# Altium PCB cell_adapter.PcbDoc
Units mm, origin at the board's own origin, x right, y up, seen from the top; angles counter-clockwise.
Board outline 516 x 110 mm, 4 copper layers (Top Layer, Layer 1, Layer 2, Bottom Layer), stack 1.514 mm thick; 23 components, 25 nets, 89 pads, 1532 vias.
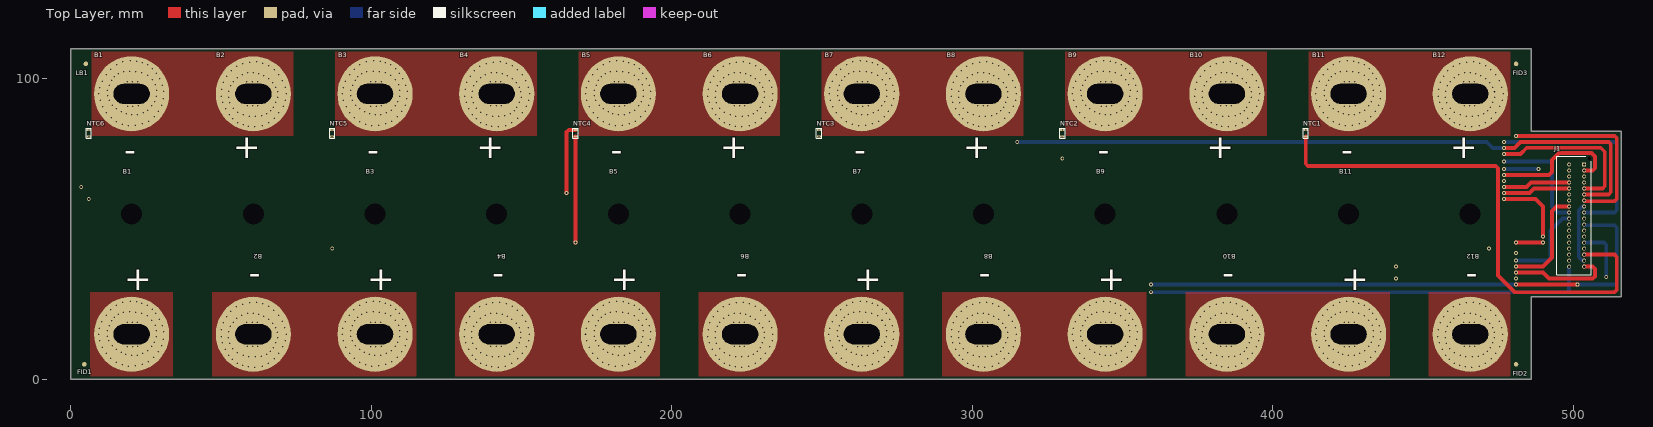
[diagram p0: Top Layer view]
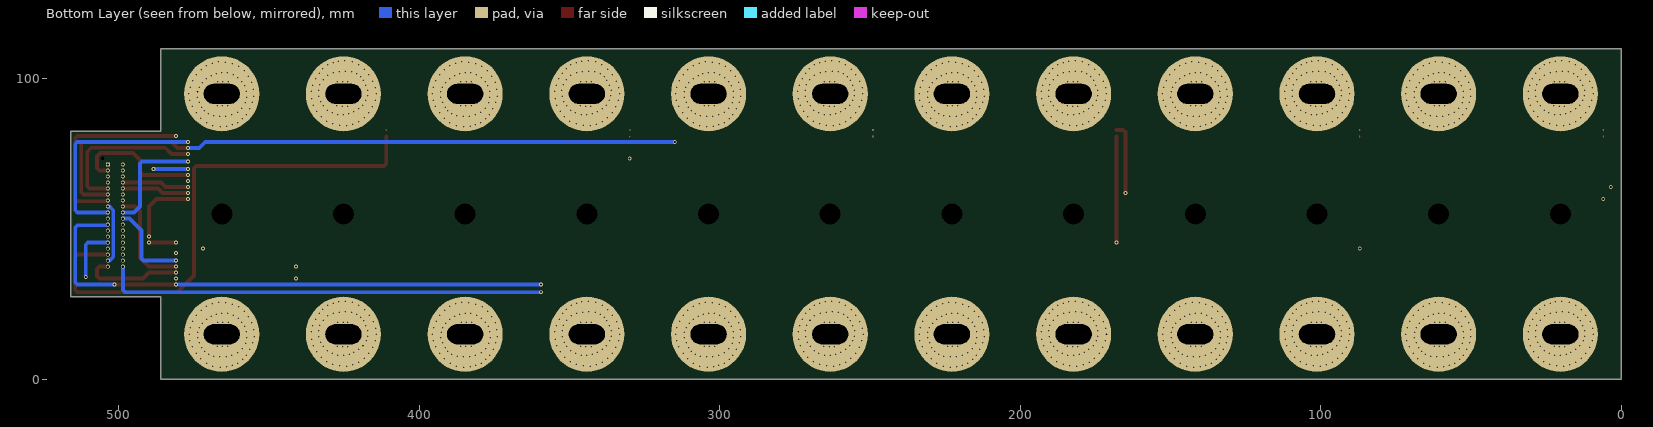
[diagram p1: Bottom Layer view, seen from below]
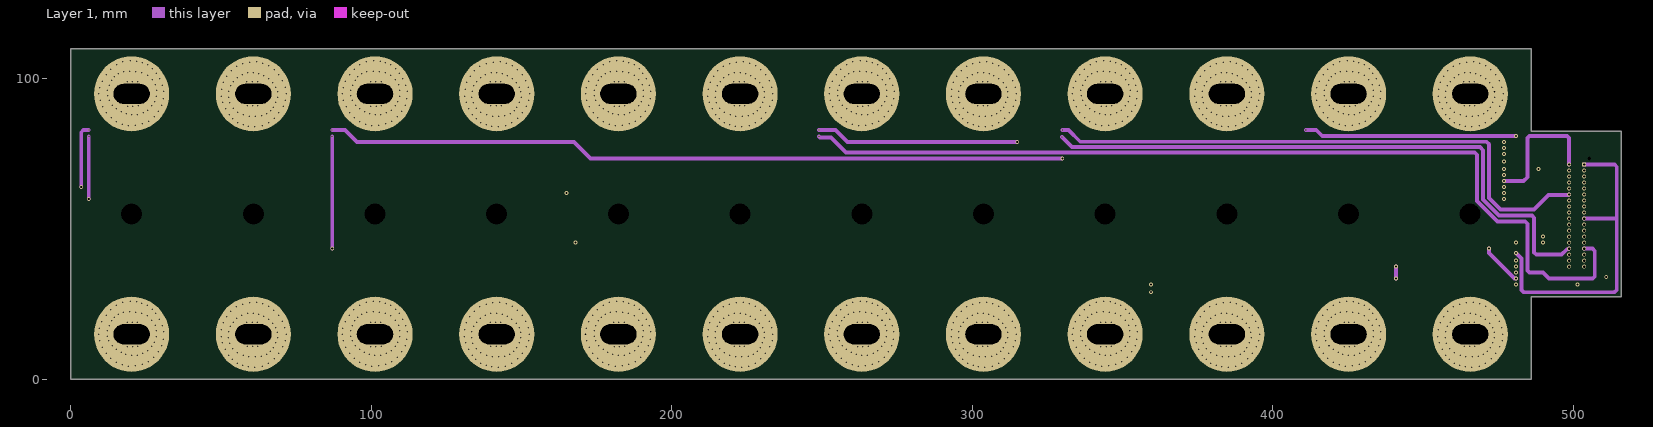
[diagram p2: Layer 1]
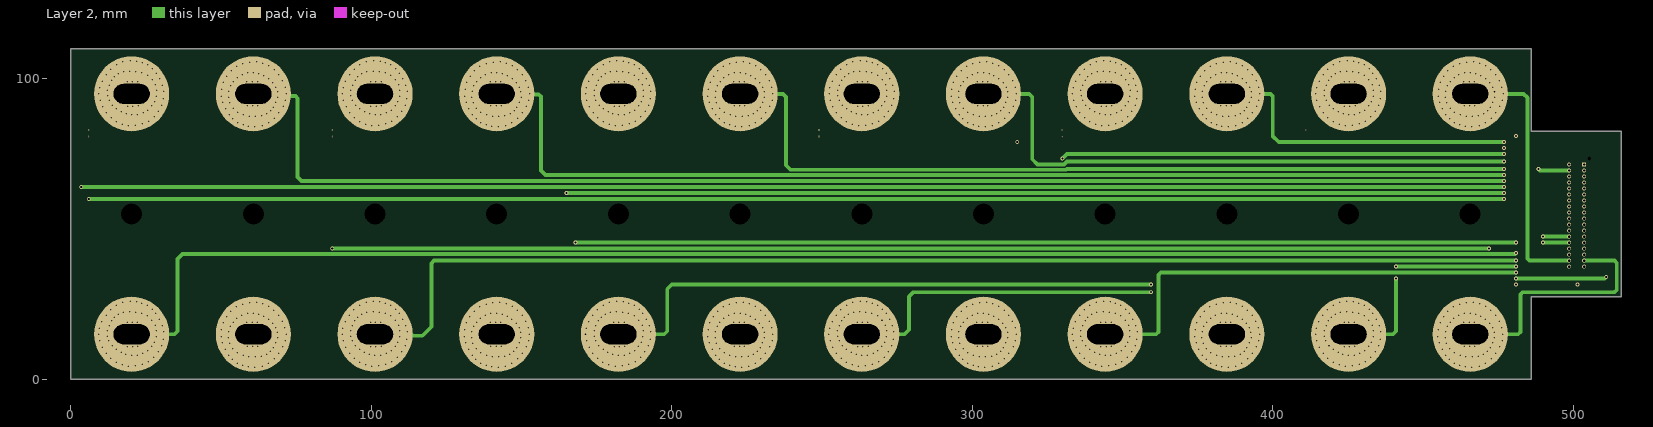
[diagram p3: Layer 2]

## Layer stack, top to bottom
Top Solder: solder mask 0.0102, Solder Resist, Dk 3.5
Top Layer: signal copper 0.0356
Dielectric 2: prepreg 0.2083, PP-006, Dk 4.1
Layer 1: signal copper 0.018
Dielectric 1: dielectric 0.9906, FR-4, Dk 4.8
Layer 2: signal copper 0.018
Dielectric 3: prepreg 0.2083, PP-006, Dk 4.1
Bottom Layer: signal copper 0.0356
Bottom Solder: solder mask 0.0102, Solder Resist, Dk 3.5

## Board outline
0.126,0.003 0.129,0 486,0 486,27.5 516,27.5 516,82.5 486,82.5 486,110 0,110 0,0

## Design rules (kind name [scope] priority, off if disabled: settings)
Clearance [All] p1: gap=0.5 ignorepadtopadclearanceinfootprint=TRUE
HoleSize [All] p1: absolutevalues=TRUE maxlimit=12 minlimit=0.025 maxpercent=80.000 minpercent=20.000
PolygonConnect [All] p1: connectstyle=Relief reliefconductorwidth=0.254 reliefentries=4 polygonreliefangle="90 Angle" airgapwidth=0.254
RoutingVias [All] p1: holewidth=0.711 width=1.27 viastyle="Through Hole" minholewidth=0.711 minwidth=1.27 maxholewidth=0.711 maxwidth=1.27
SilkToSolderMaskClearance [IsPad] p1: minsilkscreentomaskgap=0.102 clearancetoexposedcopper=TRUE
SolderMaskExpansion [All] p1: expansion=0.102 istentingtop=FALSE
Width [All] p1: maxlimit=3 minlimit=1.27 preferedwidth=1.27
28 further rules are at their usual default settings.

## Components (designator, comment, footprint, x,y, rotation, side; value= is the part's Value field where it differs from the comment)
B1 "LIBAT" LI-BATTERY 20.25,55 r0 top
B2 "LIBAT" LI-BATTERY 60.75,55 r180 top
B3 "LIBAT" LI-BATTERY 101.25,55 r0 top
B4 "LIBAT" LI-BATTERY 141.75,55 r180 top
B5 "LIBAT" LI-BATTERY 182.25,55 r0 top
B6 "LIBAT" LI-BATTERY 222.75,55 r180 top
B7 "LIBAT" LI-BATTERY 263.25,55 r0 top
B8 "LIBAT" LI-BATTERY 303.75,55 r180 top
B9 "LIBAT" LI-BATTERY 344.25,55 r0 top
B10 "LIBAT" LI-BATTERY 384.75,55 r180 top
B11 "LIBAT" LI-BATTERY 425.25,55 r0 top
B12 "LIBAT" LI-BATTERY 465.75,55 r180 top
FID1 "PE PAD" FIDUCIAL 4.5,5 r0 top
FID2 "PE PAD" FIDUCIAL 481,5 r90 top
FID3 "PE PAD" FIDUCIAL 481,105 r90 top
J1 "0559173610" "MICROFIT 36 VER" 502,55.5 r270 top
LB1 "PE PAD" FIDUCIAL 5,105 r0 top
NTC1 "10k" NTC0805-HC 411,82 r180 top
NTC2 "10k" NTC0805-HC 330,82 r180 top
NTC3 "10k" NTC0805-HC 249,82 r180 top
NTC4 "10k" NTC0805-HC 168,82 r180 top
NTC5 "10k" NTC0805-HC 87,82 r180 top
NTC6 "10k" NTC0805-HC 6,82 r180 top

## Footprints (in the part's own frame and the unit in brackets; to place one, negate y for a bottom-side part, rotate by r counter-clockwise, add the part's x,y. Pads: shape width x height; smd on the part's side, far side on the other; paste and mask are expansions set on the pad)
FIDUCIAL [mm]
  round 1.5 smd mask+0.75: 0(0,0)
LI-BATTERY [mm]
  round 0 hole 7: 0(0,0)
  round 25 hole 6.6 slot 12 at 0 deg: 1(0,-40) 2(0,40)
"MICROFIT 36 VER" [mm]
  rect 1.3x1.3 hole 0.8: 1(-16,1.65)
  round 1.3 hole 0.8: 2(-16,-3.35) 3(-14,1.65) 4(-14,-3.35) 5(-12,1.65) 6(-12,-3.35) 7(-10,1.65) 8(-10,-3.35) 9(-8,1.65) 10(-8,-3.35) 11(-6,1.65) 12(-6,-3.35) 13(-4,1.65) 14(-4,-3.35) 15(-2,1.65) 16(-2,-3.35) 17(0,1.65) 18(0,-3.35) 19(2,1.65) 20(2,-3.35) 21(4,1.65) 22(4,-3.35) 23(6,1.65) 24(6,-3.35) 25(8,1.65) 26(8,-3.35) 27(10,1.65) 28(10,-3.35) 29(12,1.65) 30(12,-3.35) 31(14,1.65) 32(14,-3.35) 33(16,1.65) 34(16,-3.35) 35(18,1.65) 36(18,-3.35)
  round 0.65 hole 1.3 unplated: MH1(-18,3.35)
  silkscreen extent -18.7,-7.45 20.7,4.05, body extent -18.73,-7.44 20.67,4.06, height 9.75
NTC0805-HC [mm]
  rect 1.45x0.75 smd: 1(0,-0.973) 2(0,1.227)
  silkscreen extent -0.89,-1.52 0.89,1.78, body extent -0.63,-0.87 0.63,1.13, height 0.95

## Part data
B1 B2 B3 B4 B5 B6 B7 B8 B9 B10 B11 B12: library part LI-BATTERY
FID1 FID2 FID3 LB1: "FIDUCIAL"
J1: library part "Header 18X2", "CONN HEADER VERT 36POS 2MM", Manufacturer_Name=Molex, Datasheet Link=https://www.molex.com/en-us/products/part-detail-pdf/559173610?display=pdf, Height=9.95mm, Manufacturer_Part_Number=0559173610
NTC1 NTC2 NTC3 NTC4 NTC5 NTC6: library part NTCS0805E3103FLT, "THERMISTOR NTC 10KOHM 3430K 0805", Manufacturer_Name=Vishay, Mouser Part Number=594-NTCS0805E3103FLT, Arrow Part Number=NTCS0805E3103FLT, Arrow Price/Stock=https://www.arrow.com/en/products/ntcs0805e3103flt/vishay, Datasheet Link=http://www.vishay.com/docs/29044/ntcs0805e3t.pdf, Height=0.95mm, Manufacturer_Part_Number=NTCS0805E3103FLT, Mouser Price/Stock=https://www.mouser.co.uk/ProductDetail/Vishay-BC-Components/NTCS0805E3103FLT?qs=%2FWiulJ9oly4Pd4lidS66Yw%3D%3D

## Via types
v1: diameter 1, hole 0.5, Top Layer to Bottom Layer, tented both sides, 1488 vias
v2: diameter 1.27, hole 0.711, Top Layer to Bottom Layer, tented both sides, 35 vias
v3: diameter 0.6, hole 0.3, Top Layer to Bottom Layer, tented both sides, 9 vias

## Nets (pads, with @x,y where several pads share a name; then routed paths per layer and width w, separated by ;. In a path a pad name is that pad's centre, name@x,y a point inside that pad or via, vN(x,y) a via of type N, cw(c..) or ccw(c..) an arc to the next point about the centre after c; other vN are vias at no path point)
B1+: B11.2 B12.1 J1.34 | length 87.2
  Layer 2 w1.27: B12.1 476.697,95 483.5,95 484.77,93.73 484.77,40.244 485.514,39.5 J1.34
  other v1: 466.283,84.032 464.124,84.159 468.722,84.362 424.183,84.413 426.52,84.489 462.321,84.642 422.151,84.921 428.806,84.997 460.492,85.429 470.83,85.429 420.145,85.759 430.889,85.836 458.867,86.725 472.76,86.801 418.392,87.055 432.718,87.385 466.41,87.512 464.353,87.614 468.493,87.664 427.18,88.02 462.423,88.02 425.275,88.045 457.673,88.096 470.195,88.376 423.421,88.401 474.259,88.63 416.817,88.706 429.06,88.757 460.492,88.858 421.796,89.036 434.14,89.138 471.516,89.366 430.686,89.62 456.504,90.001 420.195,90.027 459.019,90.281 472.43,90.585 415.598,90.636 475.631,90.839 423.904,90.941 425.606,90.941 427.409,90.966 431.956,91.017 463.801,91.035 465.623,91.043 467.249,91.068 435.308,91.144 418.798,91.271 457.876,92.033 455.539,92.135 473.243,92.236 432.87,92.414 414.734,92.795 417.757,92.795 476.443,92.948 435.842,93.43 457.495,93.862 473.853,93.887 433.48,94.218 455.057,94.218 417.224,94.37 476.697,94.98 414.353,95.056 473.827,95.665 435.994,95.818 457.571,95.818 417.198,96.148 433.556,96.173 455.209,96.605 414.607,97.088 473.294,97.24 476.316,97.24 458.181,97.621 417.808,97.799 435.512,97.901 433.175,98.002 472.252,98.764 455.742,98.891 423.802,98.967 425.428,98.993 427.25,99 459.095,99.018 463.642,99.069 465.445,99.094 467.147,99.094 415.42,99.196 475.453,99.399 418.621,99.45 432.032,99.755 470.855,100.009 434.546,100.034 460.365,100.415 419.535,100.669 456.911,100.898 469.255,100.999 430.559,101.177 461.991,101.279 474.234,101.33 416.792,101.406 467.63,101.634 420.856,101.66 433.378,101.939 465.775,101.99 428.628,102.015 463.87,102.015 422.558,102.371 426.698,102.422 424.64,102.523 458.333,102.65 472.659,102.981 418.29,103.235 432.184,103.311 460.162,104.2 470.906,104.276 420.221,104.606 430.559,104.606 462.245,105.038 468.9,105.114 428.73,105.394 464.531,105.546 466.868,105.622 422.329,105.673 426.926,105.876 424.767,106.003
B1-: B12.2 J1.15 J1.33 | length 102.4
  Layer 2 w1.27: B12.2 481.756,15 482.5,15.744 482.5,28.256 483.244,29 513.756,29 514.5,29.744 514.5,38.75 513.756,39.494 503.656,39.494 J1.33
  Bottom Layer w1.27: J1.33 503.644,39.506 503.12,39.506 501.865,40.761 501.865,56.239 503.12,57.494 503.644,57.494 J1.15
  other v1: 466.233,3.997 464.074,4.124 468.671,4.327 462.27,4.606 460.441,5.394 470.779,5.394 458.816,6.689 472.71,6.765 466.36,7.477 464.302,7.578 468.442,7.629 462.372,7.985 457.622,8.061 470.144,8.34 474.208,8.594 460.441,8.823 471.465,9.331 456.454,9.966 458.968,10.245 472.379,10.55 475.58,10.804 463.75,11 465.572,11.007 467.198,11.033 457.825,11.998 455.488,12.099 473.192,12.201 476.393,12.912 457.444,13.827 473.802,13.852 455.006,14.182 476.647,14.944 473.776,15.63 457.52,15.782 455.158,16.57 473.243,17.205 476.266,17.205 458.13,17.586 472.202,18.729 455.692,18.856 459.044,18.983 463.591,19.034 465.394,19.059 467.096,19.059 475.402,19.364 470.805,19.973 460.314,20.38 456.86,20.862 469.204,20.964 461.94,21.243 474.183,21.294 467.579,21.599 465.725,21.955 463.82,21.98 458.282,22.615 472.608,22.945 460.111,24.164 470.855,24.241 462.194,25.003 468.849,25.079 464.48,25.511 466.817,25.587
B2+: B10.2 B11.1 J1.16 | length 112.7
  Top Layer w1.27: v2(481,37.5) 490,37.5 493,40.5 493,56 494.494,57.494 498.644,57.494 J1.16
  Layer 1 w1.27: v2(441,33.5) v2(441,37.5)
  Layer 2 w1.27: B11.1 440,15 441,16 v2(441,33.5) ; v2(441,37.5) v2(481,37.5)
  other v1: 385.233,3.997 383.074,4.124 387.671,4.327 424.132,4.378 426.469,4.454 381.27,4.606 422.1,4.886 428.755,4.962 379.441,5.394 389.779,5.394 420.094,5.724 430.838,5.8 377.816,6.689 391.71,6.765 418.341,7.019 432.667,7.35 385.36,7.477 383.302,7.578 387.442,7.629 381.372,7.985 427.13,7.985 425.225,8.01 376.622,8.061 389.144,8.34 423.37,8.366 393.208,8.594 416.766,8.67 429.009,8.721 379.441,8.823 421.745,9.001 434.089,9.102 390.465,9.331 430.635,9.585 375.454,9.966 420.145,9.991 377.968,10.245 391.379,10.55 415.547,10.601 394.58,10.804 423.853,10.906 425.555,10.906 427.358,10.931 431.905,10.982 382.75,11 384.572,11.007 386.198,11.033 435.258,11.109 418.748,11.236 376.825,11.998 374.488,12.099 392.192,12.201 432.819,12.379 414.684,12.76 417.706,12.76 395.393,12.912 435.791,13.395 376.444,13.827 392.802,13.852 374.006,14.182 433.429,14.182 417.173,14.335 395.647,14.944 414.303,15.02 392.776,15.63 376.52,15.782 435.943,15.782 417.147,16.113 433.505,16.138 374.158,16.57 414.557,17.052 392.243,17.205 395.266,17.205 377.13,17.586 417.757,17.764 435.461,17.865 433.124,17.967 391.202,18.729 374.692,18.856 423.751,18.932 425.377,18.957 378.044,18.983 427.199,18.965 382.591,19.034 384.394,19.059 386.096,19.059 415.369,19.161 394.402,19.364 418.57,19.415 431.981,19.719 389.805,19.973 434.496,19.999 379.314,20.38 419.484,20.634 375.86,20.862 388.204,20.964 430.508,21.142 380.94,21.243 393.183,21.294 416.741,21.37 386.579,21.599 420.805,21.624 433.327,21.904 384.725,21.955 382.82,21.98 428.577,21.98 422.507,22.336 426.647,22.386 424.59,22.488 377.282,22.615 391.608,22.945 418.24,23.199 432.133,23.275 379.111,24.164 389.855,24.241 420.17,24.571 430.508,24.571 381.194,25.003 387.849,25.079 428.679,25.358 383.48,25.511 385.817,25.587 422.278,25.638 426.876,25.841 424.717,25.968
B3+: B9.2 B10.1 J1.17 | length 177.6
  Layer 2 w1.27: B10.1 395.697,95 399.256,95 400,94.256 400,81 402,79 v2(477,79)
  Bottom Layer w1.27: v2(477,79) 513.756,79 514.5,78.256 514.5,56.25 513.756,55.506 503.656,55.506 J1.17
  other v1: 385.283,84.032 383.124,84.159 387.722,84.362 343.183,84.413 345.52,84.489 381.321,84.642 341.151,84.921 347.806,84.997 379.492,85.429 389.83,85.429 339.145,85.759 349.889,85.836 377.867,86.725 391.76,86.801 337.392,87.055 351.718,87.385 385.41,87.512 383.353,87.614 387.493,87.664 346.18,88.02 381.423,88.02 344.275,88.045 376.673,88.096 389.195,88.376 342.421,88.401 393.259,88.63 335.817,88.706 348.06,88.757 379.492,88.858 340.796,89.036 353.14,89.138 390.516,89.366 349.686,89.62 375.504,90.001 339.195,90.027 378.019,90.281 391.43,90.585 334.598,90.636 394.631,90.839 342.904,90.941 344.606,90.941 346.409,90.966 350.956,91.017 382.801,91.035 384.623,91.043 386.249,91.068 354.308,91.144 337.798,91.271 376.876,92.033 374.539,92.135 392.243,92.236 351.87,92.414 333.734,92.795 336.757,92.795 395.443,92.948 354.842,93.43 376.495,93.862 392.853,93.887 352.48,94.218 374.057,94.218 336.224,94.37 395.697,94.98 333.353,95.056 392.827,95.665 354.994,95.818 376.571,95.818 336.198,96.148 352.556,96.173 374.209,96.605 333.607,97.088 392.294,97.24 395.316,97.24 377.181,97.621 336.808,97.799 354.512,97.901 352.175,98.002 391.252,98.764 374.742,98.891 342.802,98.967 344.428,98.993 346.25,99 378.095,99.018 382.642,99.069 384.445,99.094 386.147,99.094 334.42,99.196 394.453,99.399 337.621,99.45 351.032,99.755 389.855,100.009 353.546,100.034 379.365,100.415 338.535,100.669 375.911,100.898 388.255,100.999 349.559,101.177 380.991,101.279 393.234,101.33 335.792,101.406 386.63,101.634 339.856,101.66 352.378,101.939 384.775,101.99 347.628,102.015 382.87,102.015 341.558,102.371 345.698,102.422 343.64,102.523 377.333,102.65 391.659,102.981 337.29,103.235 351.184,103.311 379.162,104.2 389.906,104.276 339.221,104.606 349.559,104.606 381.245,105.038 387.9,105.114 347.73,105.394 383.531,105.546 385.868,105.622 341.329,105.673 345.926,105.876 343.767,106.003
B4+: B8.2 B9.1 J1.35 | length 190.1
  Top Layer w1.27: v2(481,35.5) 490,35.5 492.002,33.498 506.486,33.498 507.23,34.242 507.23,36.756 506.486,37.5 J1.35
  Layer 2 w1.27: B9.1 361.256,15 362,15.744 362,34.756 362.744,35.5 v2(481,35.5)
  other v1: 304.233,3.997 302.074,4.124 306.671,4.327 343.132,4.378 345.469,4.454 300.27,4.606 341.1,4.886 347.755,4.962 298.441,5.394 308.779,5.394 339.094,5.724 349.838,5.8 296.816,6.689 310.71,6.765 337.341,7.019 351.667,7.35 304.36,7.477 302.302,7.578 306.442,7.629 300.372,7.985 346.13,7.985 344.225,8.01 295.622,8.061 308.144,8.34 342.37,8.366 312.208,8.594 335.766,8.67 348.009,8.721 298.441,8.823 340.745,9.001 353.089,9.102 309.465,9.331 349.635,9.585 294.454,9.966 339.145,9.991 296.968,10.245 310.379,10.55 334.547,10.601 313.58,10.804 342.853,10.906 344.555,10.906 346.358,10.931 350.905,10.982 301.75,11 303.572,11.007 305.198,11.033 354.258,11.109 337.748,11.236 295.825,11.998 293.488,12.099 311.192,12.201 351.819,12.379 333.684,12.76 336.706,12.76 314.393,12.912 354.791,13.395 295.444,13.827 311.802,13.852 293.006,14.182 352.429,14.182 336.173,14.335 314.647,14.944 333.303,15.02 311.776,15.63 295.52,15.782 354.943,15.782 336.147,16.113 352.505,16.138 293.158,16.57 333.557,17.052 311.243,17.205 314.266,17.205 296.13,17.586 336.757,17.764 354.461,17.865 352.124,17.967 310.202,18.729 293.692,18.856 342.751,18.932 344.377,18.957 297.044,18.983 346.199,18.965 301.591,19.034 303.394,19.059 305.096,19.059 334.369,19.161 313.402,19.364 337.57,19.415 350.981,19.719 308.805,19.973 353.496,19.999 298.314,20.38 338.484,20.634 294.86,20.862 307.204,20.964 349.508,21.142 299.94,21.243 312.183,21.294 335.741,21.37 305.579,21.599 339.805,21.624 352.327,21.904 303.725,21.955 301.82,21.98 347.577,21.98 341.507,22.336 345.647,22.386 343.59,22.488 296.282,22.615 310.608,22.945 337.24,23.199 351.133,23.275 298.111,24.164 308.855,24.241 339.17,24.571 349.508,24.571 300.194,25.003 306.849,25.079 347.679,25.358 302.48,25.511 304.817,25.587 341.278,25.638 345.876,25.841 343.717,25.968
B5+: B7.2 B8.1 J1.18 | length 232.6
  Layer 2 w1.27: B8.1 314.697,95 319,95 320,94 320,73.244 321.744,71.5 330.503,71.5 331.503,72.5 v2(477,72.5)
  Bottom Layer w1.27: v2(477,72.5) 492.256,72.5 493,71.756 493,57.5 494.994,55.506 498.644,55.506 J1.18
  other v1: 304.283,84.032 302.124,84.159 306.722,84.362 262.183,84.413 264.52,84.489 300.321,84.642 260.151,84.921 266.806,84.997 298.492,85.429 308.83,85.429 258.145,85.759 268.889,85.836 296.867,86.725 310.76,86.801 256.392,87.055 270.718,87.385 304.41,87.512 302.353,87.614 306.493,87.664 265.18,88.02 300.423,88.02 263.275,88.045 295.673,88.096 308.195,88.376 261.421,88.401 312.259,88.63 254.817,88.706 267.06,88.757 298.492,88.858 259.796,89.036 272.14,89.138 309.516,89.366 268.686,89.62 294.504,90.001 258.195,90.027 297.019,90.281 310.43,90.585 253.598,90.636 313.631,90.839 261.904,90.941 263.606,90.941 265.409,90.966 269.956,91.017 301.801,91.035 303.623,91.043 305.249,91.068 273.308,91.144 256.798,91.271 295.876,92.033 293.539,92.135 311.243,92.236 270.87,92.414 252.734,92.795 255.757,92.795 314.443,92.948 273.842,93.43 295.495,93.862 311.853,93.887 271.48,94.218 293.057,94.218 255.224,94.37 314.697,94.98 252.353,95.056 311.827,95.665 273.994,95.818 295.571,95.818 255.198,96.148 271.556,96.173 293.209,96.605 252.607,97.088 311.294,97.24 314.316,97.24 296.181,97.621 255.808,97.799 273.512,97.901 271.175,98.002 310.252,98.764 293.742,98.891 261.802,98.967 263.428,98.993 265.25,99 297.095,99.018 301.642,99.069 303.445,99.094 305.147,99.094 253.42,99.196 313.453,99.399 256.621,99.45 270.032,99.755 308.855,100.009 272.546,100.034 298.365,100.415 257.535,100.669 294.911,100.898 307.255,100.999 268.559,101.177 299.991,101.279 312.234,101.33 254.792,101.406 305.63,101.634 258.856,101.66 271.378,101.939 303.775,101.99 266.628,102.015 301.87,102.015 260.558,102.371 264.698,102.422 262.64,102.523 296.333,102.65 310.659,102.981 256.29,103.235 270.184,103.311 298.162,104.2 308.906,104.276 258.221,104.606 268.559,104.606 300.245,105.038 306.9,105.114 266.73,105.394 302.531,105.546 304.868,105.622 260.329,105.673 264.926,105.876 262.767,106.003
B6+: B6.2 B7.1 J1.36 | length 255.7
  Layer 2 w1.27: B7.1 277.5,15 279,16.5 279,27.5 280.5,29 v2(359.5,29)
  Bottom Layer w1.27: v2(359.5,29) 497.906,29 498.65,29.744 J1.36
  other v1: 223.233,3.997 221.074,4.124 225.671,4.327 262.132,4.378 264.469,4.454 219.27,4.606 260.1,4.886 266.755,4.962 217.441,5.394 227.779,5.394 258.094,5.724 268.838,5.8 215.816,6.689 229.71,6.765 256.341,7.019 270.667,7.35 223.36,7.477 221.302,7.578 225.442,7.629 219.372,7.985 265.13,7.985 263.225,8.01 214.622,8.061 227.144,8.34 261.37,8.366 231.208,8.594 254.766,8.67 267.009,8.721 217.441,8.823 259.745,9.001 272.089,9.102 228.465,9.331 268.635,9.585 213.454,9.966 258.145,9.991 215.968,10.245 229.379,10.55 253.547,10.601 232.58,10.804 261.853,10.906 263.555,10.906 265.358,10.931 269.905,10.982 220.75,11 222.572,11.007 224.198,11.033 273.258,11.109 256.748,11.236 214.825,11.998 212.488,12.099 230.192,12.201 270.819,12.379 252.684,12.76 255.706,12.76 233.393,12.912 273.791,13.395 214.444,13.827 230.802,13.852 212.006,14.182 271.429,14.182 255.173,14.335 233.647,14.944 252.303,15.02 230.776,15.63 214.52,15.782 273.943,15.782 255.147,16.113 271.505,16.138 212.158,16.57 252.557,17.052 230.243,17.205 233.266,17.205 215.13,17.586 255.757,17.764 273.461,17.865 271.124,17.967 229.202,18.729 212.692,18.856 261.751,18.932 263.377,18.957 216.044,18.983 265.199,18.965 220.591,19.034 222.394,19.059 224.096,19.059 253.369,19.161 232.402,19.364 256.57,19.415 269.981,19.719 227.805,19.973 272.496,19.999 217.314,20.38 257.484,20.634 213.86,20.862 226.204,20.964 268.508,21.142 218.94,21.243 231.183,21.294 254.741,21.37 224.579,21.599 258.805,21.624 271.327,21.904 222.725,21.955 220.82,21.98 266.577,21.98 260.507,22.336 264.647,22.386 262.59,22.488 215.282,22.615 229.608,22.945 256.24,23.199 270.133,23.275 217.111,24.164 227.855,24.241 258.17,24.571 268.508,24.571 219.194,25.003 225.849,25.079 266.679,25.358 221.48,25.511 223.817,25.587 260.278,25.638 264.876,25.841 262.717,25.968
B7+: B5.2 B6.1 J1.4 | length 300
  Layer 2 w1.27: B6.1 233.697,95 237,95 238,94 238,71.244 239.514,69.73 331.236,69.73 331.506,70 v2(477,70) ; v2(488.5,70) 489,69.5 J1.4
  Bottom Layer w1.27: v2(477,70) v2(488.5,70)
  other v1: 223.283,84.032 221.124,84.159 225.722,84.362 181.183,84.413 183.52,84.489 219.321,84.642 179.151,84.921 185.806,84.997 217.492,85.429 227.83,85.429 177.145,85.759 187.889,85.836 215.867,86.725 229.76,86.801 175.392,87.055 189.718,87.385 223.41,87.512 221.353,87.614 225.493,87.664 184.18,88.02 219.423,88.02 182.275,88.045 214.673,88.096 227.195,88.376 180.421,88.401 231.259,88.63 173.817,88.706 186.06,88.757 217.492,88.858 178.796,89.036 191.14,89.138 228.516,89.366 187.686,89.62 213.504,90.001 177.195,90.027 216.019,90.281 229.43,90.585 172.598,90.636 232.631,90.839 180.904,90.941 182.606,90.941 184.409,90.966 188.956,91.017 220.801,91.035 222.623,91.043 224.249,91.068 192.308,91.144 175.798,91.271 214.876,92.033 212.539,92.135 230.243,92.236 189.87,92.414 171.734,92.795 174.757,92.795 233.443,92.948 192.842,93.43 214.495,93.862 230.853,93.887 190.48,94.218 212.057,94.218 174.224,94.37 233.697,94.98 171.353,95.056 230.827,95.665 192.994,95.818 214.571,95.818 174.198,96.148 190.556,96.173 212.209,96.605 171.607,97.088 230.294,97.24 233.316,97.24 215.181,97.621 174.808,97.799 192.512,97.901 190.175,98.002 229.252,98.764 212.742,98.891 180.802,98.967 182.428,98.993 184.25,99 216.095,99.018 220.642,99.069 222.445,99.094 224.147,99.094 172.42,99.196 232.453,99.399 175.621,99.45 189.032,99.755 227.855,100.009 191.546,100.034 217.365,100.415 176.535,100.669 213.911,100.898 226.255,100.999 187.559,101.177 218.991,101.279 231.234,101.33 173.792,101.406 224.63,101.634 177.856,101.66 190.378,101.939 222.775,101.99 185.628,102.015 220.87,102.015 179.558,102.371 183.698,102.422 181.64,102.523 215.333,102.65 229.659,102.981 175.29,103.235 189.184,103.311 217.162,104.2 227.906,104.276 177.221,104.606 187.559,104.606 219.245,105.038 225.9,105.114 185.73,105.394 221.531,105.546 223.868,105.622 179.329,105.673 183.926,105.876 181.767,106.003
B8+: B4.2 B5.1 J1.21 | length 377.1
  Top Layer w1.27: v2(481,31.5) v2(501.5,31.5)
  Layer 2 w1.27: B5.1 192.943,15 197.5,15 198.5,16 198.5,30 200,31.5 v2(359.5,31.5)
  Bottom Layer w1.27: v2(359.5,31.5) v2(481,31.5) ; v2(501.5,31.5) 513.756,31.5 514.5,32.244 514.5,50.541 513.756,51.285 503.873,51.285 503.658,51.5 J1.21
  other v1: 142.233,3.997 140.074,4.124 144.671,4.327 181.132,4.378 183.469,4.454 138.27,4.606 179.1,4.886 185.755,4.962 136.441,5.394 146.779,5.394 177.094,5.724 187.838,5.8 134.816,6.689 148.71,6.765 175.341,7.019 189.667,7.35 142.36,7.477 140.302,7.578 144.442,7.629 138.372,7.985 184.13,7.985 182.225,8.01 133.622,8.061 146.144,8.34 180.37,8.366 150.208,8.594 173.766,8.67 186.009,8.721 136.441,8.823 178.745,9.001 191.089,9.102 147.465,9.331 187.635,9.585 132.454,9.966 177.145,9.991 134.968,10.245 148.379,10.55 172.547,10.601 151.58,10.804 180.853,10.906 182.555,10.906 184.358,10.931 188.905,10.982 139.75,11 141.572,11.007 143.198,11.033 192.258,11.109 175.748,11.236 133.825,11.998 131.488,12.099 149.192,12.201 189.819,12.379 171.684,12.76 174.706,12.76 152.393,12.912 192.791,13.395 133.444,13.827 149.802,13.852 131.006,14.182 190.429,14.182 174.173,14.335 152.647,14.944 171.303,15.02 149.776,15.63 133.52,15.782 192.943,15.782 174.147,16.113 190.505,16.138 131.158,16.57 171.557,17.052 149.243,17.205 152.266,17.205 134.13,17.586 174.757,17.764 192.461,17.865 190.124,17.967 148.202,18.729 131.692,18.856 180.751,18.932 182.377,18.957 135.044,18.983 184.199,18.965 139.591,19.034 141.394,19.059 143.096,19.059 172.369,19.161 151.402,19.364 175.57,19.415 188.981,19.719 146.805,19.973 191.496,19.999 136.314,20.38 176.484,20.634 132.86,20.862 145.204,20.964 187.508,21.142 137.94,21.243 150.183,21.294 173.741,21.37 143.579,21.599 177.805,21.624 190.327,21.904 141.725,21.955 139.82,21.98 185.577,21.98 179.507,22.336 183.647,22.386 181.59,22.488 134.282,22.615 148.608,22.945 175.24,23.199 189.133,23.275 136.111,24.164 146.855,24.241 177.17,24.571 187.508,24.571 138.194,25.003 144.849,25.079 185.679,25.358 140.48,25.511 142.817,25.587 179.278,25.638 183.876,25.841 181.717,25.968
B9+: B3.2 B4.1 J1.3 | length 404.9
  Top Layer w1.27: v2(477,68) 491.986,68 493,69.014 493,72.986 495.299,75.285 506.089,75.285 507.23,74.144 507.23,70.244 506.486,69.5 J1.3
  Layer 2 w1.27: B4.1 142.167,94.583 B4.1@152.697,94.583 ; v1(152.697,94.98) 152.697,94.841 152.712,94.827 155.756,94.827 156.5,94.083 156.5,69.5 158.04,67.96 331.969,67.96 332.009,68 v2(477,68)
  other v1: 142.283,84.032 140.124,84.159 144.722,84.362 100.183,84.413 102.52,84.489 138.321,84.642 98.151,84.921 104.806,84.997 136.492,85.429 146.83,85.429 96.145,85.759 106.889,85.836 134.867,86.725 148.76,86.801 94.392,87.055 108.718,87.385 142.41,87.512 140.353,87.614 144.493,87.664 103.18,88.02 138.423,88.02 101.275,88.045 133.673,88.096 146.195,88.376 99.421,88.401 150.259,88.63 92.817,88.706 105.06,88.757 136.492,88.858 97.796,89.036 110.14,89.138 147.516,89.366 106.686,89.62 132.504,90.001 96.195,90.027 135.019,90.281 148.43,90.585 91.598,90.636 151.631,90.839 99.904,90.941 101.606,90.941 103.409,90.966 107.956,91.017 139.801,91.035 141.623,91.043 143.249,91.068 111.308,91.144 94.798,91.271 133.876,92.033 131.539,92.135 149.243,92.236 108.87,92.414 90.734,92.795 93.757,92.795 152.443,92.948 111.842,93.43 133.495,93.862 149.853,93.887 109.48,94.218 131.057,94.218 93.224,94.37 90.353,95.056 149.827,95.665 111.994,95.818 133.571,95.818 93.198,96.148 109.556,96.173 131.209,96.605 90.607,97.088 149.294,97.24 152.316,97.24 134.181,97.621 93.808,97.799 111.512,97.901 109.175,98.002 148.252,98.764 131.742,98.891 99.802,98.967 101.428,98.993 103.25,99 135.095,99.018 139.642,99.069 141.445,99.094 143.147,99.094 91.42,99.196 151.453,99.399 94.621,99.45 108.032,99.755 146.855,100.009 110.546,100.034 136.365,100.415 95.535,100.669 132.911,100.898 145.255,100.999 106.559,101.177 137.991,101.279 150.234,101.33 92.792,101.406 143.63,101.634 96.856,101.66 109.378,101.939 141.775,101.99 104.628,102.015 139.87,102.015 98.558,102.371 102.698,102.422 100.64,102.523 134.333,102.65 148.659,102.981 94.29,103.235 108.184,103.311 136.162,104.2 146.906,104.276 96.221,104.606 106.559,104.606 138.245,105.038 144.9,105.114 104.73,105.394 140.531,105.546 142.868,105.622 98.329,105.673 102.926,105.876 100.767,106.003
B10+: B2.2 B3.1 J1.20 | length 432.6
  Layer 2 w1.27: B3.1 102.405,16.155 109.505,16.155 B3.1@111.943,16.155 ; v1(111.943,15.782) 111.943,15.298 112.212,15.03 113.329,15.03 113.859,14.5 117,14.5 120,17.5 120,38.584 120.916,39.5 v2(481,39.5)
  Bottom Layer w1.27: v2(481,39.5) 491.756,39.5 492.5,40.244 492.5,49.5 496.5,53.5 J1.20@498.642,53.5
  other v1: 61.233,3.997 59.074,4.124 63.671,4.327 100.132,4.378 102.469,4.454 57.27,4.606 98.1,4.886 104.755,4.962 55.441,5.394 65.779,5.394 96.094,5.724 106.838,5.8 53.816,6.689 67.71,6.765 94.341,7.019 108.667,7.35 61.36,7.477 59.302,7.578 63.442,7.629 57.372,7.985 103.13,7.985 101.225,8.01 52.622,8.061 65.144,8.34 99.37,8.366 69.208,8.594 92.766,8.67 105.009,8.721 55.441,8.823 97.745,9.001 110.089,9.102 66.465,9.331 106.635,9.585 51.454,9.966 96.145,9.991 53.968,10.245 67.379,10.55 91.547,10.601 70.58,10.804 99.853,10.906 101.555,10.906 103.358,10.931 107.905,10.982 58.75,11 60.572,11.007 62.198,11.033 111.258,11.109 94.748,11.236 52.825,11.998 50.488,12.099 68.192,12.201 108.819,12.379 90.684,12.76 93.706,12.76 71.393,12.912 111.791,13.395 52.444,13.827 68.802,13.852 50.006,14.182 109.429,14.182 93.173,14.335 71.647,14.944 90.303,15.02 68.776,15.63 52.52,15.782 93.147,16.113 109.505,16.138 50.158,16.57 90.557,17.052 68.243,17.205 71.266,17.205 53.13,17.586 93.757,17.764 111.461,17.865 109.124,17.967 67.202,18.729 50.692,18.856 99.751,18.932 101.377,18.957 54.044,18.983 103.199,18.965 58.591,19.034 60.394,19.059 62.096,19.059 91.369,19.161 70.402,19.364 94.57,19.415 107.981,19.719 65.805,19.973 110.496,19.999 55.314,20.38 95.484,20.634 51.86,20.862 64.204,20.964 106.508,21.142 56.94,21.243 69.183,21.294 92.741,21.37 62.579,21.599 96.805,21.624 109.327,21.904 60.725,21.955 58.82,21.98 104.577,21.98 98.507,22.336 102.647,22.386 100.59,22.488 53.282,22.615 67.608,22.945 94.24,23.199 108.133,23.275 55.111,24.164 65.855,24.241 96.17,24.571 106.508,24.571 57.194,25.003 63.849,25.079 104.679,25.358 59.48,25.511 61.817,25.587 98.278,25.638 102.876,25.841 100.717,25.968
B11+: B1.2 B2.1 J1.2 | length 505.8
  Layer 1 w1.27: B2.1@66.45,89.3 B2.1 B2.1@71.697,95 ; v2(477,66) 483.527,66 484.771,67.244 484.771,80.256 485.515,81 497.906,81 498.65,80.256 J1.2
  Layer 2 w1.27: v1(66.516,89.366) 69.32,89.366 B2.1@69.658,89.028 ; v1(69.259,88.63) B2.1@69.658,89.028 ; v1(70.631,90.839) 70.631,93.189 71.712,94.27 74.756,94.27 75.5,93.526 75.5,67.324 76.824,66 v2(477,66) ; B2.1@71.05,90.65 71.05,90.42 B2.1@69.658,89.028
  other v1: 61.283,84.032 59.124,84.159 63.722,84.362 19.183,84.413 21.52,84.489 57.321,84.642 17.151,84.921 23.806,84.997 55.492,85.429 65.83,85.429 15.145,85.759 25.889,85.836 53.867,86.725 67.76,86.801 13.392,87.055 27.718,87.385 61.41,87.512 59.353,87.614 63.493,87.664 22.18,88.02 57.423,88.02 20.275,88.045 52.673,88.096 65.195,88.376 18.421,88.401 11.817,88.706 24.06,88.757 55.492,88.858 16.796,89.036 29.14,89.138 25.686,89.62 51.504,90.001 15.195,90.027 54.019,90.281 67.43,90.585 10.598,90.636 18.904,90.941 20.606,90.941 22.409,90.966 26.956,91.017 58.801,91.035 60.623,91.043 62.249,91.068 30.308,91.144 13.798,91.271 52.876,92.033 50.539,92.135 68.243,92.236 27.87,92.414 9.734,92.795 12.757,92.795 71.443,92.948 30.842,93.43 52.495,93.862 68.853,93.887 28.48,94.218 50.057,94.218 12.224,94.37 71.697,94.98 9.353,95.056 68.827,95.665 30.994,95.818 52.571,95.818 12.198,96.148 28.556,96.173 50.209,96.605 9.607,97.088 68.294,97.24 71.316,97.24 53.181,97.621 12.808,97.799 30.512,97.901 28.175,98.002 67.252,98.764 50.742,98.891 18.802,98.967 20.428,98.993 22.25,99 54.095,99.018 58.642,99.069 60.445,99.094 62.147,99.094 10.42,99.196 70.453,99.399 13.621,99.45 27.032,99.755 65.855,100.009 29.546,100.034 55.365,100.415 14.535,100.669 51.911,100.898 64.255,100.999 25.559,101.177 56.991,101.279 69.234,101.33 11.792,101.406 62.63,101.634 15.856,101.66 28.378,101.939 60.775,101.99 23.628,102.015 58.87,102.015 17.558,102.371 21.698,102.422 19.64,102.523 53.333,102.65 67.659,102.981 13.29,103.235 27.184,103.311 55.162,104.2 65.906,104.276 15.221,104.606 25.559,104.606 57.245,105.038 63.9,105.114 23.73,105.394 59.531,105.546 61.868,105.622 17.329,105.673 21.926,105.876 19.767,106.003
B12+: B1.1 J1.1 J1.19 | length 594.3
  Layer 1 w1.27: v2(481,42) 481.003,42 482.77,40.233 482.77,29.744 483.514,29 513.756,29 514.5,29.744 514.5,53.5 ; J1.19 514.5,53.5 ; J1.1 503.665,71.485 513.756,71.485 514.5,70.741 514.5,53.5
  Layer 2 w1.27: B1.1 34.5,15 35.5,16 35.5,40 37.23,41.73 480.73,41.73 v2(481,42)
  other v1: 19.132,4.378 21.469,4.454 17.1,4.886 23.755,4.962 15.094,5.724 25.838,5.8 13.341,7.019 27.667,7.35 22.13,7.985 20.225,8.01 18.37,8.366 11.766,8.67 24.009,8.721 16.745,9.001 29.089,9.102 25.635,9.585 15.145,9.991 10.547,10.601 18.853,10.906 20.555,10.906 22.358,10.931 26.905,10.982 30.258,11.109 13.748,11.236 27.819,12.379 9.684,12.76 12.706,12.76 30.791,13.395 28.429,14.182 12.173,14.335 9.303,15.02 30.943,15.782 12.147,16.113 28.505,16.138 9.557,17.052 12.757,17.764 30.461,17.865 28.124,17.967 18.751,18.932 20.377,18.957 22.199,18.965 10.369,19.161 13.57,19.415 26.981,19.719 29.496,19.999 14.484,20.634 25.508,21.142 11.741,21.37 15.805,21.624 28.327,21.904 23.577,21.98 17.507,22.336 21.647,22.386 19.59,22.488 13.24,23.199 27.133,23.275 15.17,24.571 25.508,24.571 23.679,25.358 17.278,25.638 21.876,25.841 19.717,25.968
"GND NTC 1": J1.31 NTC1.2 | length 173.7
  Top Layer w1.27: NTC1.2 411,71.744 411.744,71 474.256,71 475,70.256 475,34.5 480.5,29 513.756,29 514.5,29.744 514.5,40.756 513.756,41.5 J1.31
"GND NTC 2": J1.30 NTC2.2 | length 202.2
  Layer 1 w1.27: v3@329.893,80.607 333.23,77.27 468.986,77.27 470,76.256 470,59.808 475.308,54.5 486.256,54.5 487,53.756 487,42.244 487.744,41.5 496.126,41.5 497.911,43.285 498.427,43.285 498.642,43.5 J1.30
  other v3: 329.943,80.693
"GND NTC 3": J1.29 NTC3.2 | length 308.6
  Layer 1 w1.27: v3(249,80.773) 249.273,80.5 253,80.5 258,75.5 467.256,75.5 468,74.756 468,59.305 474.805,52.5 484.024,52.5 484.767,51.756 484.767,36.244 485.511,35.5 490,35.5 491.979,33.521 506.466,33.521 507.21,34.265 507.21,42.756 506.466,43.5 J1.29
"GND NTC 4": J1.28 NTC4.2 | length 365.9
  Top Layer w1.27: v2(168,45.5) NTC4.2 ; v2(481,45.5) v2(490,45.5)
  Layer 2 w1.27: v2(168,45.5) v2(481,45.5) ; v2(490,45.5) J1.28
"GND NTC 5": J1.27 NTC5.2 | length 484.9
  Layer 1 w1.27: v2(87,43.5) 87,77 v3(87,80.773) ; v2(472,43.5) 472,41.997 480.497,33.5 v2(481,33.5)
  Layer 2 w1.27: v2(87,43.5) v2(472,43.5) ; v2(481,33.5) 510.5,33.5 v2(511,34)
  Bottom Layer w1.27: J1.27 510.256,45.5 511,44.756 v2(511,34)
"GND NTC 6": J1.26 NTC6.2 | length 524.5
  Top Layer w1.27: v2(477,60) 487.5,60 490,57.5 v2(490,47.5)
  Layer 1 w1.27: v2(6,60) v3(6,80.773)
  Layer 2 w1.27: v2(6,60) v2(477,60) ; v2(490,47.5) J1.26
"NTC 1": J1.13 NTC1.1 | length 136.1
  Top Layer w1.27: v2(481,81) 513.756,81 514.5,80.256 514.5,60.029 513.756,59.285 503.873,59.285 503.658,59.5 J1.13
  Layer 1 w1.27: v3(411,82.973) 411.027,83 414.5,83 416.5,81 v2(481,81)
"NTC 2": J1.12 NTC2.1 | length 192.2
  Layer 1 w1.27: v3(330,82.973) 330.042,82.931 332.069,82.931 335.96,79.04 471.216,79.04 472,78.256 472,60.311 475.811,56.5 487,56.5 491.785,61.285 498.427,61.285 498.642,61.5 J1.12
"NTC 3": J1.11 NTC3.1 | length 292.3
  Top Layer w1.27: v2(477,77) 480.5,77 482.5,79 511.756,79 512.5,78.256 512.5,62.244 511.756,61.5 J1.11
  Layer 1 w1.27: v3@249,82.973 249.027,83 254.5,83 258.5,79 v2(315,79)
  Bottom Layer w1.27: v2(315,79) 471.256,79 473.256,77 v2(477,77)
  other v3: 249.013,82.987
"NTC 4": J1.10 NTC4.1 | length 357.8
  Top Layer w1.27: v2(165,62) 165,82.256 165.744,83 167.973,83 NTC4.1 ; v2(477,62) 485.5,62 487,63.5 J1.10
  Layer 2 w1.27: v2(165,62) v2(477,62)
"NTC 5": J1.9 NTC5.1 | length 448.1
  Top Layer w1.27: v2(477,75) 482.5,75 484.555,77.055 509.201,77.055 510.5,75.756 510.5,64.244 509.756,63.5 J1.9
  Layer 1 w1.27: v3(87,82.973) 91.264,82.973 95.237,79 167.5,79 173,73.5 v2(330,73.5)
  Layer 2 w1.27: v2(330,73.5) 331.5,75 v2(477,75)
"NTC 6": J1.8 NTC6.1 | length 516.8
  Top Layer w1.27: v2(477,64) 484.5,64 486,65.5 J1.8
  Layer 1 w1.27: v2(3.5,64) 3.473,64.027 3.473,82.229 4.217,82.973 v3(6,82.973)
  Layer 2 w1.27: v2(3.5,64) v2(477,64)
pads on no net: B1.0 B2.0 B3.0 B4.0 B5.0 B6.0 B7.0 B8.0 B9.0 B10.0 B11.0 B12.0 FID1.0 FID2.0 FID3.0 J1.5 J1.6 J1.7 J1.14 J1.22 J1.23 J1.24 J1.25 J1.32 J1.MH1 LB1.0

## Polygon pours and split planes (outlines as drawn)
B1- on Top Layer "NONET_L-01_P-001" (solid, pour order 14): 452,1 452,29 479,29 479,1
B12+ on Top Layer "NONET_L-01_P-001" (solid, pour order 13): 6.5,1 6.5,29 34,29 34,1
B2+ on Top Layer "NONET_L-01_P-001" (solid, pour order 12): 371,1 371,29 439,29 439,1
B4+ on Top Layer "NONET_L-01_P-001" (solid, pour order 11): 290,1 290,29 358,29 358,1
B6+ on Top Layer "NONET_L-01_P-001" (solid, pour order 10): 209,1 209,29 277,29 277,1
B8+ on Top Layer "NONET_L-01_P-001" (solid, pour order 9): 128,1 128,29 196,29 196,1
B10+ on Top Layer "NONET_L-01_P-001" (solid, pour order 8): 47,1 47,29 115,29 115,1
B1+ on Top Layer "NONET_L-01_P-001" (solid, pour order 7): 412,109 412,81 479,81 479,109
B3+ on Top Layer "NONET_L-01_P-001" (solid, pour order 6): 331,109 331,81 398,81 398,109
B5+ on Top Layer "NONET_L-01_P-001" (solid, pour order 5): 250,109 250,81 317,81 317,109
B7+ on Top Layer "NONET_L-01_P-001" (solid, pour order 4): 169,109 169,81 236,81 236,109
B9+ on Top Layer "NONET_L-01_P-001" (solid, pour order 2): 88,109 88,81 155,81 155,109
B11+ on Top Layer "NONET_L-01_P-001" (solid, pour order 1): 7,109 7,81 74,81 74,109

## Silkscreen, mask and mechanical layers (free items; w line width, h text height)
Board outline:
  lines w1: 0,0 0,110 127,110 360,110 486,110 486,82.5 516,82.5 516,27.509 486,27.509 486,0 0,0
Mechanical Drawing:
  lines w1.016: 0,0 0,110 486,110 486,82.5 516,82.5 516,27.5 486,27.5 486,0 0,0

## Dimensions
486,110 to 486,82.5 on Mechanical Drawing
516,82.5 to 486,82.5 on Mechanical Drawing
516,27.5 to 516,82.5 on Mechanical Drawing
486,27.5 to 516,27.5 on Mechanical Drawing
486,0 to 486,27.5 on Mechanical Drawing
0,0 to 486,0 on Mechanical Drawing
0,0 to 0,110 on Mechanical Drawing

## Text inside footprints (layer, text, board x,y; h text height)
B1: Top Overlay "+" at 17.75,29.667 h8; Top Overlay "-" at 17.75,72.501 h8
B2: Top Overlay "-" at 63.25,37.499 h8 r180; Top Overlay "+" at 63.25,80.333 h8 r180
B3: Top Overlay "+" at 98.75,29.667 h8; Top Overlay "-" at 98.75,72.501 h8
B4: Top Overlay "-" at 144.25,37.499 h8 r180; Top Overlay "+" at 144.25,80.333 h8 r180
B5: Top Overlay "+" at 179.75,29.667 h8; Top Overlay "-" at 179.75,72.501 h8
B6: Top Overlay "-" at 225.25,37.499 h8 r180; Top Overlay "+" at 225.25,80.333 h8 r180
B7: Top Overlay "+" at 260.75,29.667 h8; Top Overlay "-" at 260.75,72.501 h8
B8: Top Overlay "-" at 306.25,37.499 h8 r180; Top Overlay "+" at 306.25,80.333 h8 r180
B9: Top Overlay "+" at 341.75,29.667 h8; Top Overlay "-" at 341.75,72.501 h8
B10: Top Overlay "-" at 387.25,37.499 h8 r180; Top Overlay "+" at 387.25,80.333 h8 r180
B11: Top Overlay "+" at 422.75,29.667 h8; Top Overlay "-" at 422.75,72.501 h8
B12: Top Overlay "-" at 468.25,37.499 h8 r180; Top Overlay "+" at 468.25,80.333 h8 r180